# Altium PCB PCB.PcbDoc
Units mil, origin at the board's own origin, x right, y up, seen from the top; angles counter-clockwise.
Board outline 660 x 1330 mil, 8 copper layers (Top Layer, Layer 1, Layer 2, Layer 3, Layer 4, Layer 5, Layer 6, Bottom Layer), stack 29.788 mil thick; 26 components, 19 nets, 168 pads, 187 vias.
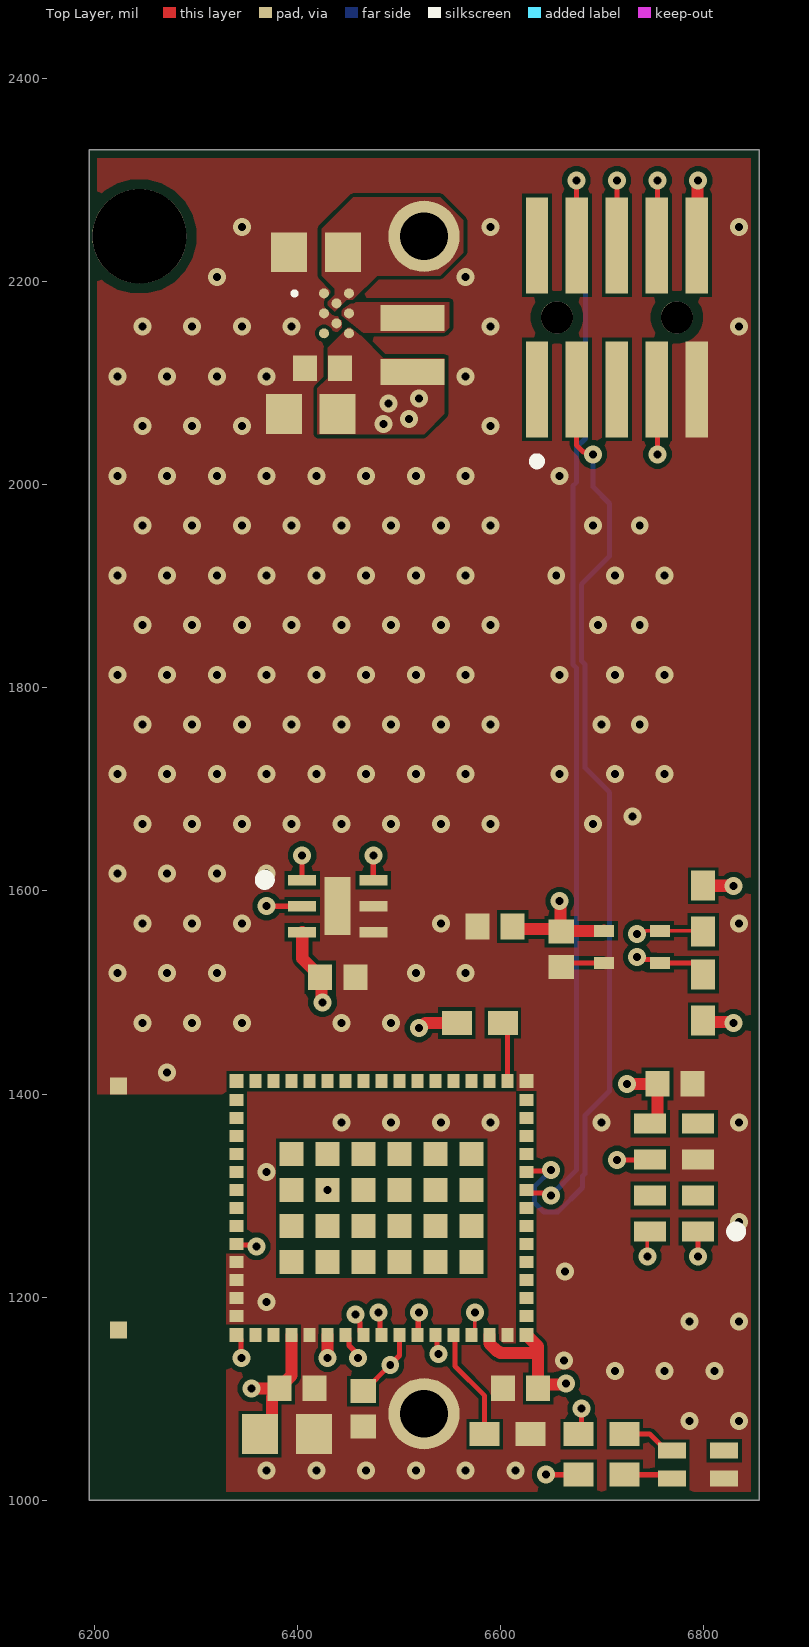
[diagram p0: Top Layer view]
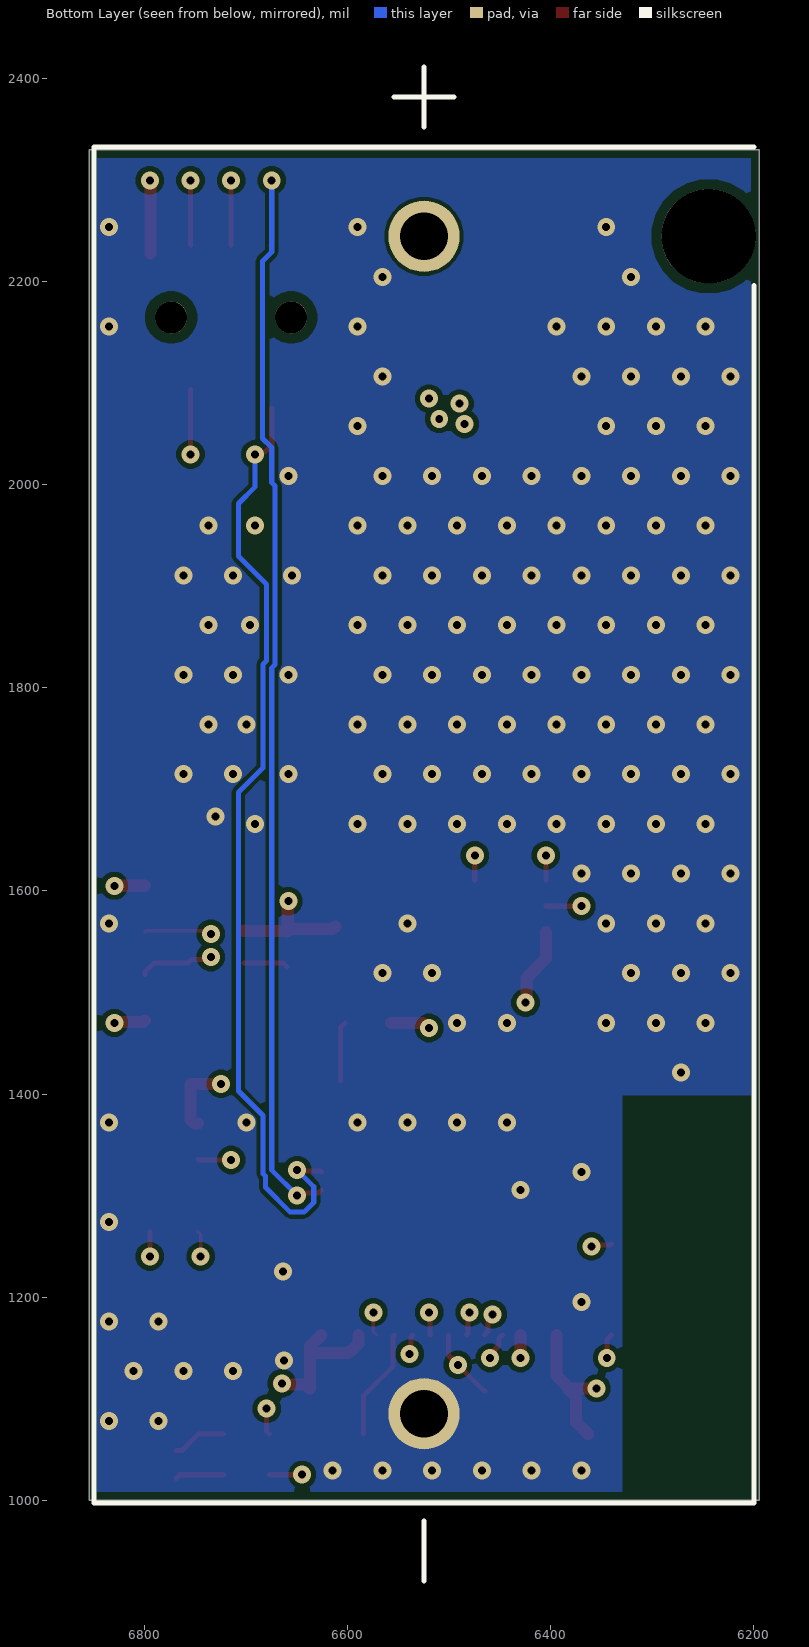
[diagram p1: Bottom Layer view, seen from below]
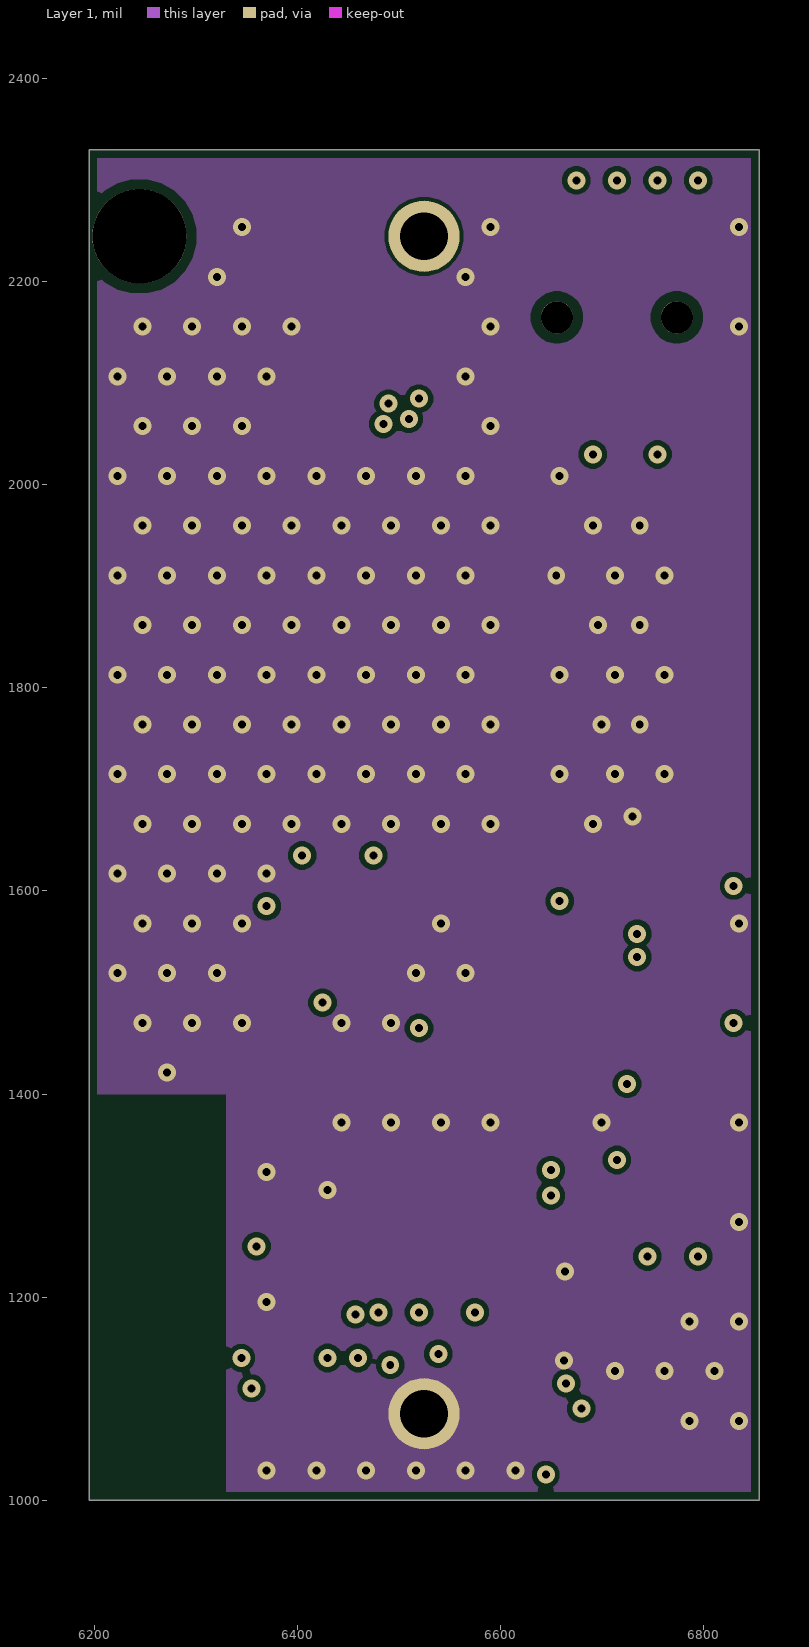
[diagram p2: Layer 1]
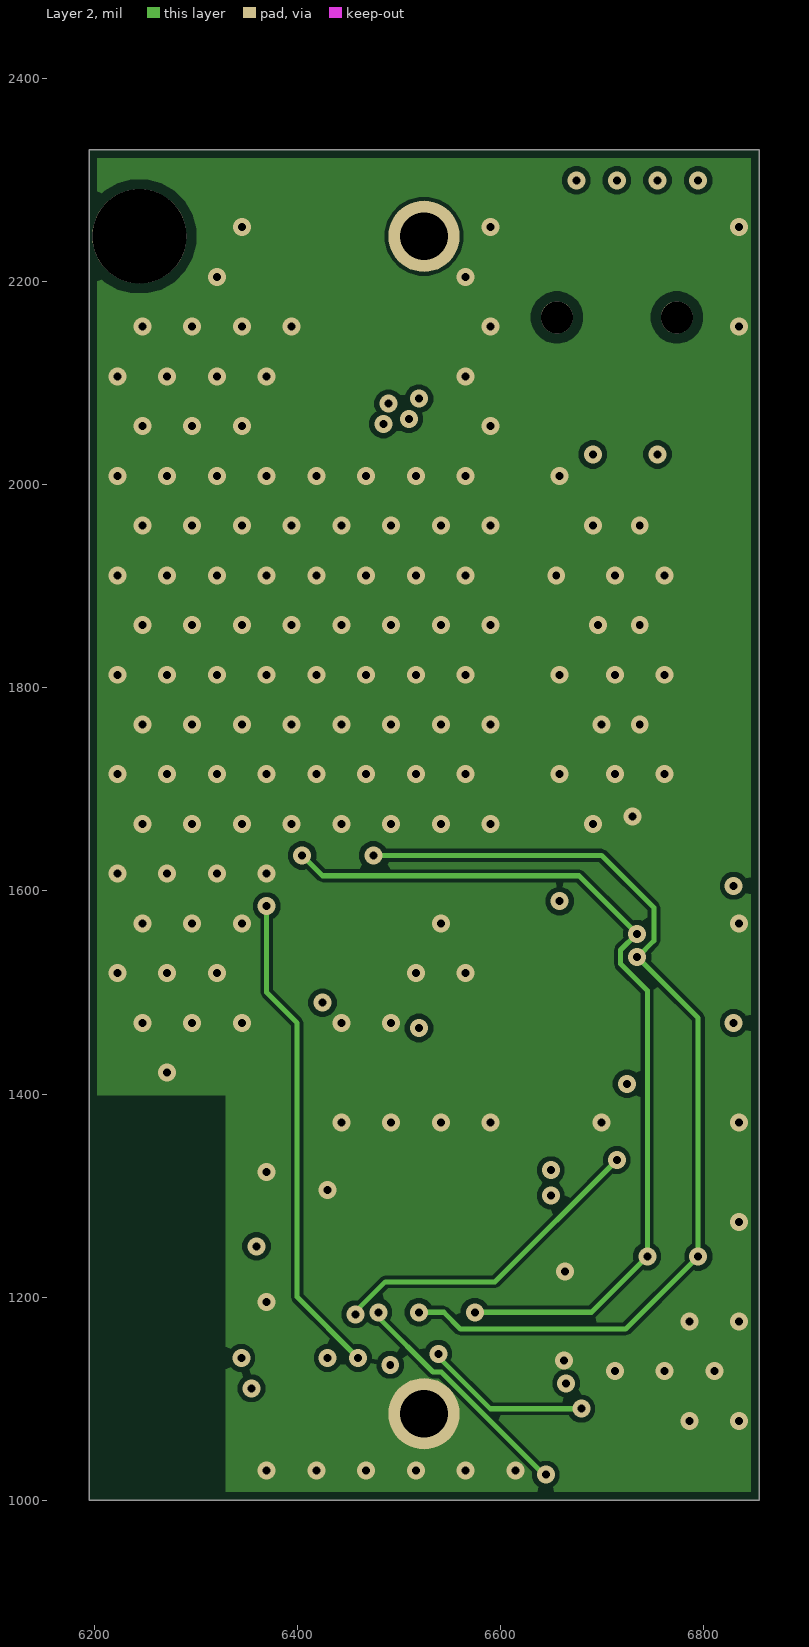
[diagram p3: Layer 2]
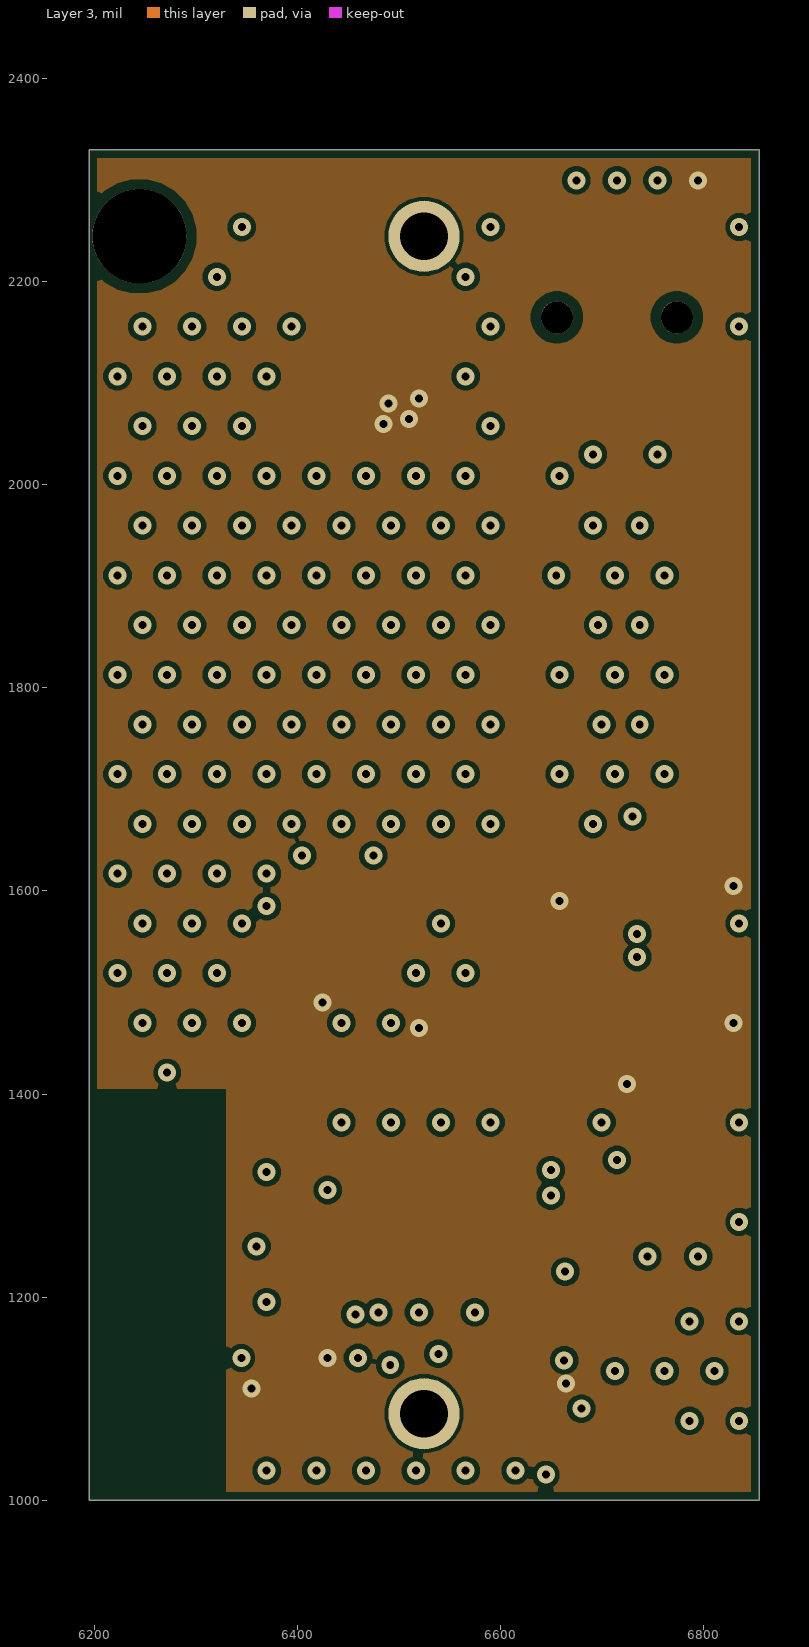
[diagram p4: Layer 3]
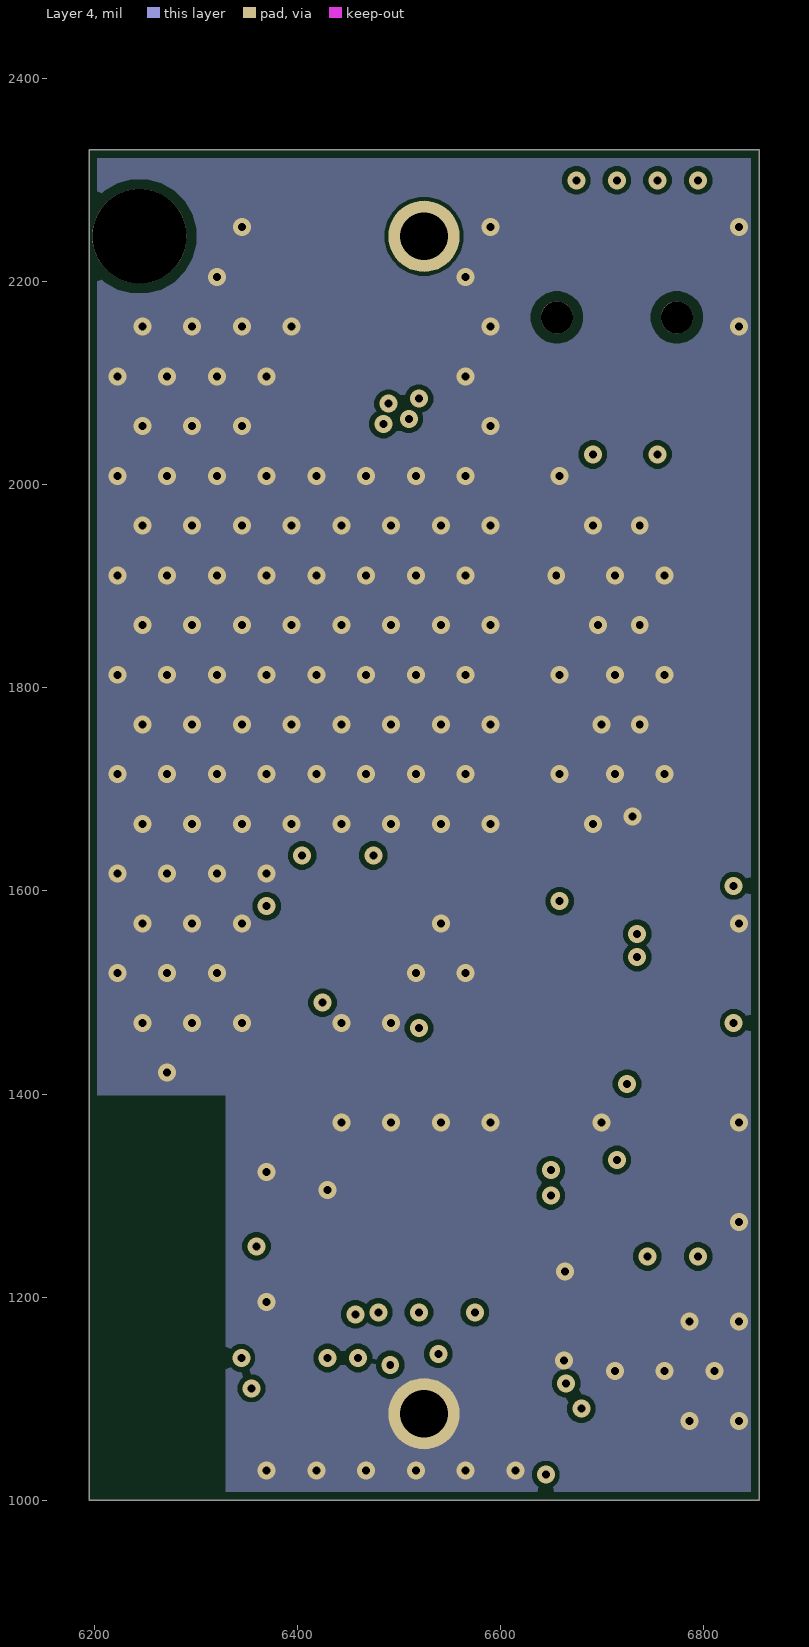
[diagram p5: Layer 4]
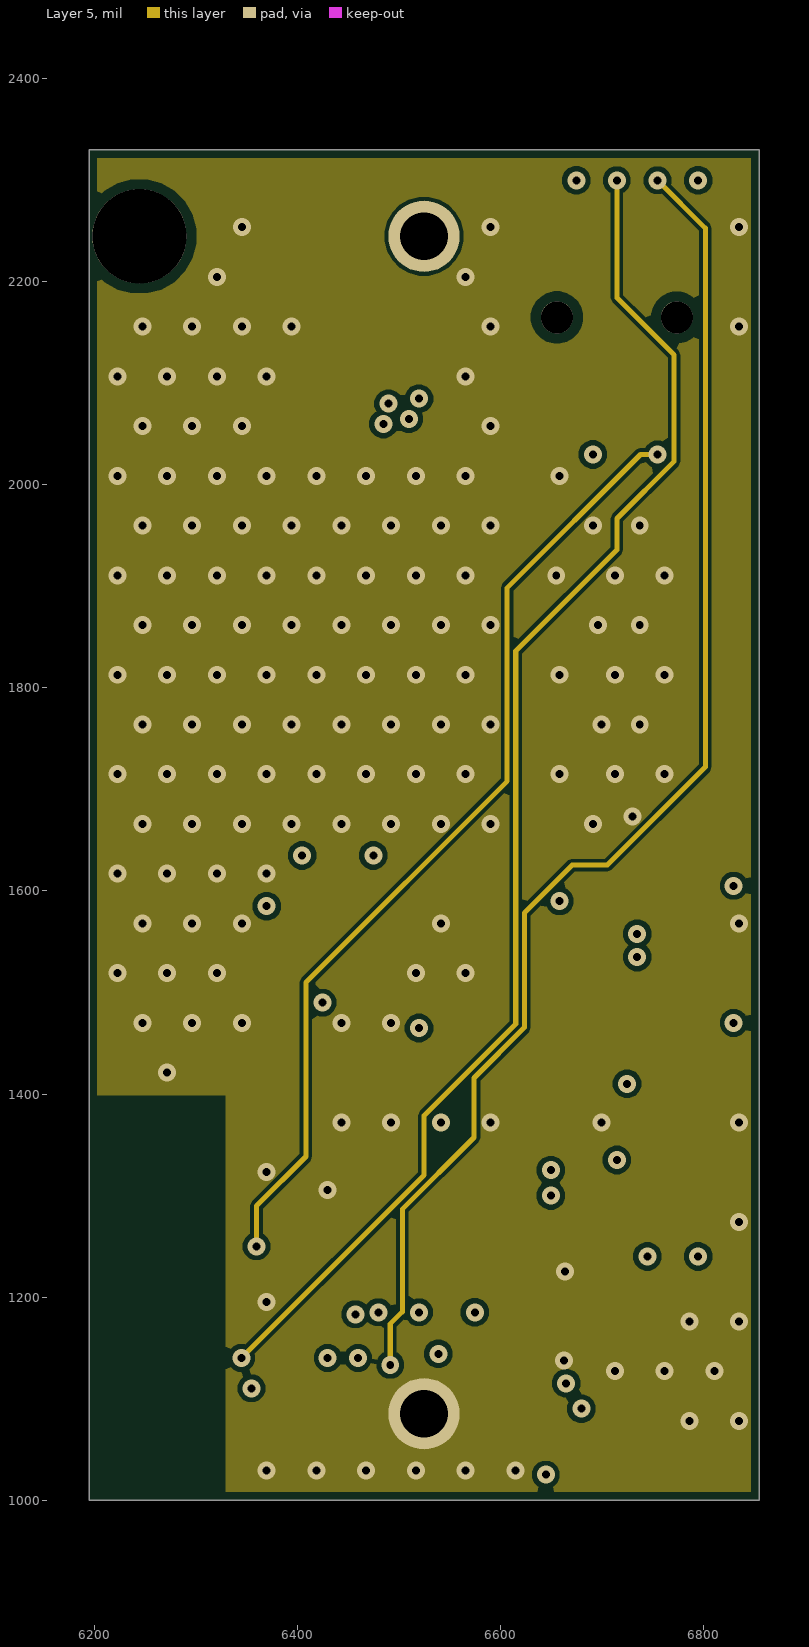
[diagram p6: Layer 5]
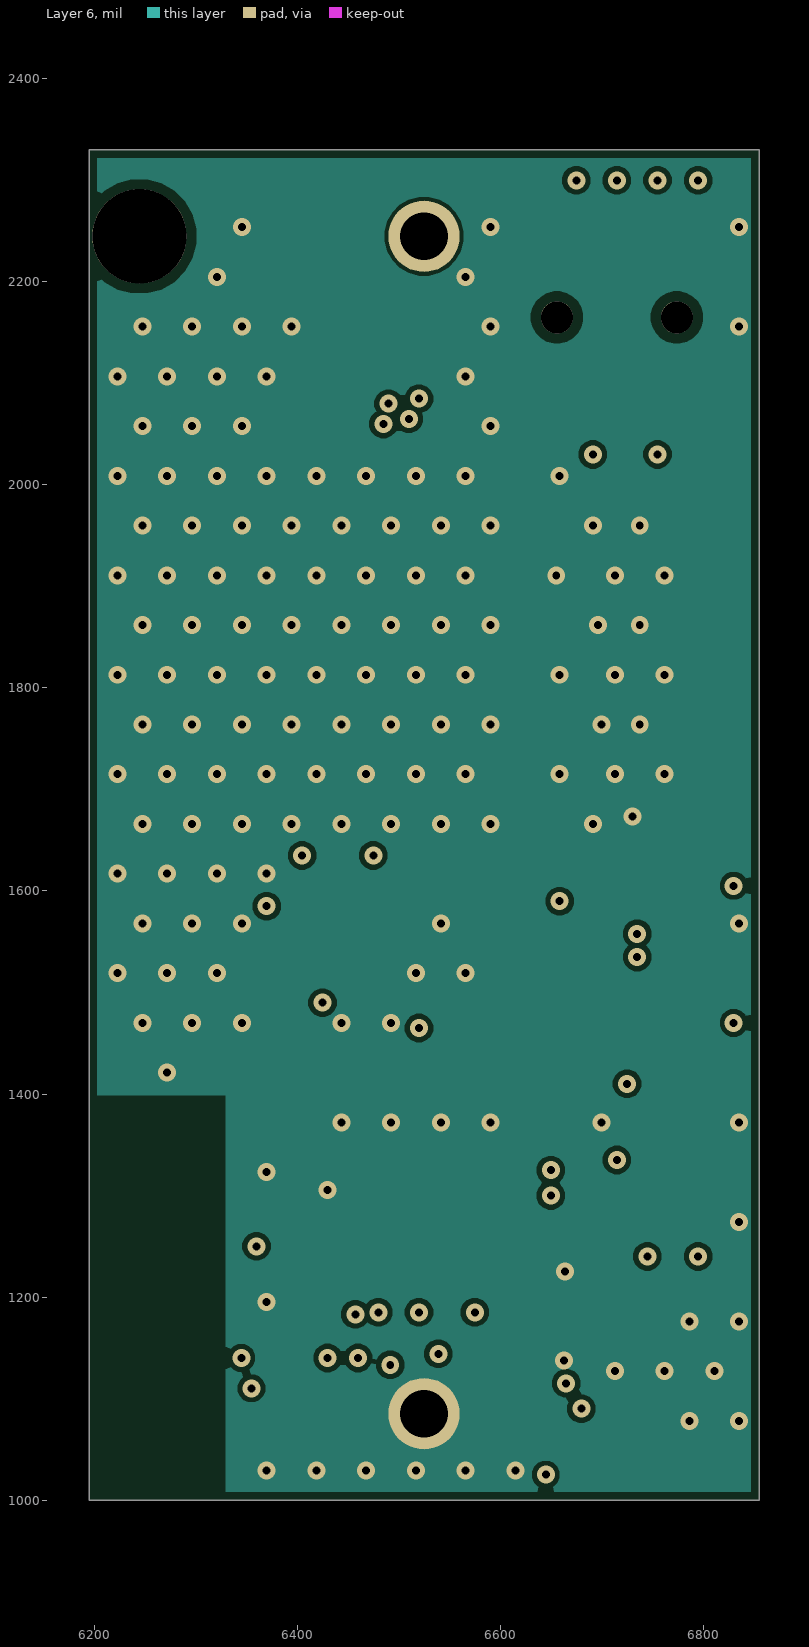
[diagram p7: Layer 6]

## Layer stack, top to bottom
Top Solder: solder mask 0.5, Solder Resist, Dk 3.8
Top Layer: signal copper 1.378
Dielectric 1: prepreg 3.0079, 1080*1, Dk 4.05
Layer 1: signal copper 0.5984
Core 1: core 2.9528, FR-4, Dk 4.5
Layer 2: signal copper 0.5984
Dielectric 2: prepreg 4.2835, 2116*1, Dk 4.25
Layer 3: signal copper 0.5984
Core 2: core 2.9528, FR-4, Dk 4.5
Layer 4: signal copper 0.5984
Dielectric 3: prepreg 4.2835, 2116*1, Dk 4.05
Layer 5: signal copper 0.5984
Dielectric 4: core 2.9528, FR-4, Dk 4.1
Layer 6: signal copper 0.5984
Dielectric 5: prepreg 3.0079, 1080*1, Dk 4.1
Bottom Layer: signal copper 1.378
Bottom Solder: solder mask 0.5, Solder Resist, Dk 3.8

## Board outline
6195,1000 6855,1000 6855,2330 6195,2330

## Design rules (kind name [scope] priority, off if disabled: settings)
BoardOutlineClearance [All] p1: gap=7.87 ignorepadtopadclearanceinfootprint=FALSE
Clearance [All] p1: gap=3.5 ignorepadtopadclearanceinfootprint=FALSE except(5: Arc-Via Track-Via SMDPad-Via THPad-Via Via-Via Via-Fill Via-Poly Via-Region Via-Text; 9.84: Arc-Hole Track-Hole SMDPad-Hole THPad-Hole Via-Hole Fill-Hole Poly-Hole Region-Hole Text-Hole)
ComponentClearance [All] p1: gap=3.5 collisioncheckmode=3 verticalgap=3.5 showdistances=TRUE
DiffPairsRouting [All] p1: maxlimit=3.5 minlimit=3.5 mostfreqgap=3.5 toplayer_minwidth=3.5 toplayer_maxwidth=71497.94 toplayer_prefwidth=3.5 midlayer1_minwidth=3.5 midlayer1_maxwidth=71497.94 midlayer1_prefwidth=3.5 midlayer2_minwidth=3.5 midlayer2_maxwidth=71497.94 midlayer2_prefwidth=3.5 midlayer3_minwidth=3.5 midlayer3_maxwidth=71497.94 midlayer3_prefwidth=3.5 midlayer4_minwidth=3.5 midlayer4_maxwidth=71497.94 midlayer4_prefwidth=3.5 midlayer5_minwidth=3.5 midlayer5_maxwidth=71497.94 midlayer5_prefwidth=3.5 midlayer6_minwidth=3.5 midlayer6_maxwidth=71497.94 midlayer6_prefwidth=3.5 bottomlayer_minwidth=3.5 bottomlayer_maxwidth=71497.94 bottomlayer_prefwidth=3.5 maxuncoupledlength=500
Height [All] p1: minheight=0 maxheight=71497.94 prefheight=500
HoleSize [All] p1: absolutevalues=TRUE maxlimit=248.03 minlimit=7.87 maxpercent=80.000 minpercent=20.000
HoleToHoleClearance [All] p1: gap=9.84 allowstackedmicrovias=FALSE
MinimumAnnularRing [All] p1: minimumring=3
MinimumSolderMaskSliver [All] p1: minsoldermaskwidth=0
PlaneClearance [All] p1: clearance=3.5
PlaneConnect PlaneConnectPowerPads [InPadClass('PowerPads')] p1: planeconnectstyle=Direct reliefexpansion=20 reliefentries=4 reliefconductorwidth=10 reliefairgap=10
PlaneConnect [All] p2: planeconnectstyle=Direct reliefexpansion=11.81 reliefentries=4 reliefconductorwidth=3.5 reliefairgap=3.5
PolygonConnect PolygonConnectPowerPads [All vs (InPadClass('PowerPads'))] p1: connectstyle=Direct reliefconductorwidth=10 reliefentries=4 polygonreliefangle="90 Angle" airgapwidth=10
PolygonConnect [All] p2: connectstyle=Direct reliefconductorwidth=3.5 reliefentries=4 polygonreliefangle="90 Angle" airgapwidth=3.5
RoomDefinition power [InComponentClass('power')] p1: confinementstyle=ConfineIn formatcopy=TRUE lockcomponents=FALSE outline 0,0 2000,0 2000,1000 0,1000
RoutingVias [All] p1: holewidth=7.87 width=17.72 viastyle="Through Hole" minholewidth=7.87 minwidth=17.72 maxholewidth=248.03 maxwidth=257.87
SilkToSilkClearance [All] p1: silktosilkclearance=0
SilkToSolderMaskClearance [IsPad] p1: minsilkscreentomaskgap=3.5 clearancetoexposedcopper=TRUE
SolderMaskExpansion SolderMaskExpansion_Via [IsVia] p1: expansion=2.95 istentingtop=TRUE
SolderMaskExpansion [All] p2: expansion=2.95 istentingtop=FALSE
Width [All] p1: maxlimit=71497.94 minlimit=3.5 preferedwidth=3.5
20 further rules are at their usual default settings.

## Classes and differential pairs
component class power: BT1 C10 C11 L1

## Components (designator, comment, footprint, x,y, rotation, side; value= is the part's Value field where it differs from the comment)
B1 "" ST1PS01AJR 6438.77,2169.04 r0 top
BT1 "" BAT_815-0931 6525,1665 r270 bottom
C1 "" "CAP 0402_1005" 6465,1090 r270 top value="0.1 µF"
C2 "" "CAP 0402_1005" 6400,1110 r180 top value="0.1 µF"
C3 "" "CAP 0402_1005" 6620,1110 r0 top value="0.1 µF"
C4 "" "CAP 0402_1005" 6440,1515 r180 top value="1 µF"
C5 "" "CAP 0402_1005" 6595,1565 r0 top value="1 µF"
C6 "" "CAP 0603_1608" 6390,1065 r180 top value="10 µF"
C7 "" "CAP 0402_1005" 6660,1542.68 r90 top value="0.1 µF"
C8 "" "CAP 0402_1005" 6772.32,1410 r180 top value="0.1 µF"
C9 "" "CAP 0402_1005" 6425,2115 r0 top value="0.1 µF"
C10 "" "CAP 0603_1608" 6418.77,2229.2 r0 top value="10 µF"
C11 "" "CAP 0603_1608" 6413.43,2070 r0 top value="10 µF"
D1 "" FP-HSMF-C165-MFG 6795,1035 r0 top
J1 "" HARWIN_M40-3200545R 6715,2165 r0 top
L1 "" "TDK VLS201612CX" 6513.77,2137.62 r270 top value="2.2 µH"
MD1 "" FP-STM32WB5MMGH6TR-MFG 6422.13,1287.72 r90 top
R1 "" "RES 0402_1005" 6580,1470 r0 top value=jmp
R2 "" "RES 0402_1005" 6607.36,1065 r180 top value="10 kOhms"
R3 "" "RES 0402_1005" 6700,1065 r180 top value="1.5 kOhms"
R4 "" "RES 0402_1005" 6800,1495 r90 top value="10 kOhms"
R5 "" "RES 0402_1005" 6800,1582.64 r270 top value="10 kOhms"
R6 "" "RES 0402_1005" 6700,1025 r180 top value="1.5 kOhms"
U1 "" STM-LCC8_V 6771.38,1317.72 r90 top
U2 "" FP-SHT40-AD1B-R2-MFG 6730,1545 r180 top
U3 "" FP-UDFN-6L-DM00423052-MFG 6440,1585 r0 top

## Footprints (in the part's own frame and the unit in brackets; to place one, negate y for a bottom-side part, rotate by r counter-clockwise, add the part's x,y. Pads: shape width x height; smd on the part's side, far side on the other; paste and mask are expansions set on the pad)
BAT_815-0931 [mm]
  round 1.785 hole 1.19: NEG(14.73,0) POS(-14.73,0)
  round 2.36 hole 2.36 unplated: ""(-14.73,7.12)
  silkscreen extent -18.97,-8.26 18.91,8.26
"CAP 0402_1005" [mm] "Chip Capacitor, 2-Leads, Body 1.02x0.51mm, IPC Medium Density"
  rect 0.6x0.64 smd: 1(-0.44,0) 2(0.44,0)
  body extent -0.5,-0.26 0.5,0.26, height 0.52
"CAP 0603_1608" [mm] "Chip Capacitor, 2-Leads, Body 1.60x0.80mm, IPC Medium Density"
  rect 0.9x1 smd: 1(-0.675,0) 2(0.675,0)
  body extent -0.8,-0.41 0.8,0.41, height 0.82
FP-HSMF-C165-MFG [mm]
  rect 0.7x0.4 smd paste+0 mask+0: 1(-0.65,0.35) 2(-0.65,-0.35) 3(0.65,0.35) 4(0.65,-0.35)
  body extent -1.1,-0.65 1.1,0.65, height 0.25
FP-SHT40-AD1B-R2-MFG [mm]
  rect 0.5x0.3 smd paste+0 mask+0: 1(-0.7,0.4) 2(-0.7,-0.4) 3(0.7,-0.4) 4(0.7,0.4)
  body extent -1.05,-0.9 1.05,0.9, height 0.25
FP-STM32WB5MMGH6TR-MFG [mm]
  rect 0.35x0.35 smd paste+0 mask+0: 1(-3.175,2.075) 17(-3.175,-5.175) 31(3.175,-5.175) 47(3.175,2.075)
  rect 0.35x0.3 smd paste+0 mask+0: 2(-3.175,1.6) 3(-3.175,1.15) 4(-3.175,0.7) 5(-3.175,0.25) 6(-3.175,-0.2) 7(-3.175,-0.65) 8(-3.175,-1.1) 9(-3.175,-1.55) 10(-3.175,-2) 11(-3.175,-2.45) 12(-3.175,-2.9) 13(-3.175,-3.35) 14(-3.175,-3.8) 15(-3.175,-4.25) 16(-3.175,-4.7) 32(3.175,-4.7) 33(3.175,-4.25) 34(3.175,-3.8) 35(3.175,-3.35) 36(3.175,-2.9) 37(3.175,-2.45) 38(3.175,-2) 39(3.175,-1.55) 40(3.175,-1.1) 41(3.175,-0.65) 42(3.175,-0.2) 43(3.175,0.25) 44(3.175,0.7) 45(3.175,1.15) 46(3.175,1.6)
  rect 0.3x0.35 smd paste+0 mask+0: 18(-2.7,-5.175) 19(-2.25,-5.175) 20(-1.8,-5.175) 21(-1.35,-5.175) 22(-0.9,-5.175) 23(-0.45,-5.175) 24(0,-5.175) 25(0.45,-5.175) 26(0.9,-5.175) 27(1.35,-5.175) 28(1.8,-5.175) 29(2.25,-5.175) 30(2.7,-5.175) 48(2.7,2.075) 49(2.25,2.075) 50(1.8,2.075) 51(1.35,2.075) 52(0.9,2.075) 53(0.45,2.075) 54(0,2.075) 55(-0.45,2.075) 56(-0.9,2.075) 57(-1.35,2.075) 58(-1.8,2.075) 59(-2.25,2.075) 60(-2.7,2.075)
  rect 0.6x0.6 smd paste+0 mask+0: 61(-1.35,0.7) 62(-1.35,-0.2) 63(-1.35,-1.1) 64(-1.35,-2) 65(-1.35,-2.9) 66(-1.35,-3.8) 67(-0.45,-3.8) 68(0.45,-3.8) 69(1.35,-3.8) 70(1.35,-2.9) 71(1.35,-2) 72(1.35,-1.1) 73(1.35,-0.2) 74(1.35,0.7) 75(0.45,0.7) 76(-0.45,0.7) 77(-0.45,-0.2) 78(-0.45,-1.1) 79(-0.45,-2) 80(-0.45,-2.9) 81(0.45,-2.9) 82(0.45,-2) 83(0.45,-1.1) 84(0.45,-0.2)
  rect 0.43x0.43 smd paste+0 mask+0: 85(-3.05,5.035) 86(3.05,5.035)
  body extent -4.19,-6.04 4.19,6.04, height 0.25
FP-UDFN-6L-DM00423052-MFG [mm]
  rect 0.7x0.27 smd paste+0 mask-1000: 1(-0.89,0.65) 2(-0.89,0) 3(-0.89,-0.65) 4(0.89,-0.65) 5(0.89,0) 6(0.89,0.65)
  rect 0.65x1.45 smd paste+0 mask-1000: 7(0,0)
  silkscreen extent -1.95,0.54 -1.7,0.78, body extent -1.34,-1.12 1.34,1.12, height 0.25
HARWIN_M40-3200545R [mm]
  rect 0.56x2.4 smd: 1(-2,-1.8) 2(-2,1.8) 3(-1,-1.8) 4(-1,1.8) 5(0,-1.8) 6(0,1.8) 7(1,-1.8) 8(1,1.8) 9(2,-1.8) 10(2,1.8)
  round 0.8 hole 0.8 unplated: ""(-1.5,0) ""(1.5,0)
  silkscreen extent -2.1,-3.7 -1.9,-3.5
"RES 0402_1005" [mm] "Chip Resistor, 2-Leads, Body 1.0x0.5mm, IPC Medium Density"
  rect 0.75x0.6 smd: 1(-0.575,0) 2(0.575,0)
  body extent -0.5,-0.25 0.5,0.25, height 0.35
ST1PS01AJR [mm]
  round 0.25 smd: A1(-0.312,0.5) A3(0.312,0.5) B2(0,0.25) C1(-0.312,0) C3(0.312,0) D2(0,-0.25) E1(-0.312,-0.5) E3(0.312,-0.5)
  silkscreen extent -1.1,0.45 -1,0.55
STM-LCC8_V [mm] "LCC, 8-Leads, Body 3.2x1.5mm, Pitch 0.9mm"
  rect 0.5x0.8 smd: 1(-1.35,-0.6) 2(-0.45,-0.6) 3(0.45,-0.6) 4(1.35,-0.6) 5(1.35,0.6) 6(0.45,0.6) 7(-0.45,0.6) 8(-1.35,0.6)
  silkscreen extent -1.47,-1.68 -1.23,-1.43, body extent -1.6,-0.75 1.6,0.75, height 0.8
"TDK VLS201612CX" [mm] "Inductor, 2-Leads, Body 2.00x1.60mm, IPC Medium Density"
  rect 0.65x1.6 smd: 1(-0.675,0) 2(0.675,0)
  body extent -1,-0.8 1,0.8, height 1.2

## Part data
B1: library part ST1PS01AJR, "Switching Voltage Regulators 400 mA nano-quiescent synchronous step-down converter digital volt selection & P", Manufacturer_Name=STMicroelectronics, Mouser Part Number=511-ST1PS01AJR, Arrow Part Number=ST1PS01AJR, Arrow Price/Stock=https://www.arrow.com/en/products/st1ps01ajr/stmicroelectronics?region=nac, Datasheet Link=https://www.st.com/resource/en/datasheet/st1ps01.pdf, Geometry.Height=0.6mm, Manufacturer_Part_Number=ST1PS01AJR, Mouser Price/Stock=https://www.mouser.co.uk/ProductDetail/STMicroelectronics/ST1PS01AJR?qs=P19jvy6W2mdx%252Bu2ylwJ4Uw%3D%3D
BT1: library part 815-0931, "Holder 1/2aa Battery w/o Cover", Package=None, Availability=Unavailable, MP=815-0931, price=None
C1 C2 C8 C9: library part C0402C104K7PAC7867, "CAP CER 0.1UF 4V X5R 0402", Capacitance="0.1 µF", Device Package="0402 (1005 Metric)", Manufacturer=KEMET, Operating Temperature="-55°C ~ 85°C", Supplier Part Number 1=399-14871-1-ND, Temperature Coefficient=X5R, Tolerance=±10%, Voltage - Rated=4V, Applications="Bypass, Decoupling", componentlink1description=Datasheet, componentlink1url=https://api.kemet.com/component-edge/download/datasheet/C0402C104K7PAC7867.pdf, ComponentLink2Description="DigiKey Link", ComponentLink2URL=https://www.digikey.com/en/products/detail/kemet/C0402C104K7PAC7867/7381987, lastupdated="1/9/2022 12:30:40 pm", Lifecycle Status=Active, Minimum Order=1, Mounting Type="Surface Mount, MLCC", Package / Case="0402 (1005 Metric)", packaging=TapeAndReel, Part Number=C0402C104K7PAC7867, Part Status=Active, partid=5603, price=0.01, series="SMD Comm X5R", Size / Dimension="0.039\" L x 0.020\" W (1.00mm x 0.50mm)", Supplier 1=DigiKey, Thickness (Max)="0.022\" (0.55mm)"
C3 C7: library part C0402C104K4RECAUTO, "CAP CER 0402 0.1UF 16V X7R 10%", Capacitance="0.1 µF", Device Package="0402 (1005 Metric)", Manufacturer=KEMET, Operating Temperature="-55°C ~ 125°C", Ratings=AEC-Q200, Supplier Part Number 1=399-17167-1-ND, Temperature Coefficient=X7R, Tolerance=±10%, Voltage - Rated=16V, Applications="Automotive, ESD Protection", componentlink1description=Datasheet, componentlink1url=https://api.kemet.com/component-edge/download/datasheet/C0402C104K4RECAUTO.pdf, ComponentLink2Description="DigiKey Link", ComponentLink2URL=https://www.digikey.com/en/products/detail/kemet/C0402C104K4RECAUTO/8563695, lastupdated="1/9/2022 12:30:53 pm", Lifecycle Status=Active, Minimum Order=1, Mounting Type="Surface Mount, MLCC", Package / Case="0402 (1005 Metric)", packaging=TapeAndReel, Part Number=C0402C104K4RECAUTO, Part Status=Active, partid=1731, price=0.01, series="ESD SMD Auto X7R", Size / Dimension="0.039\" L x 0.020\" W (1.00mm x 0.50mm)", Supplier 1=DigiKey, Thickness (Max)="0.022\" (0.55mm)"
C4 C5: library part LMK105BJ105MVHF, "CAP CER 1UF 10V X5R 0402", Capacitance="1 µF", Device Package="0402 (1005 Metric)", Manufacturer="Taiyo Yuden", Operating Temperature="-55°C ~ 85°C", Ratings=AEC-Q200, Supplier Part Number 1=587-6276-1-ND, Temperature Coefficient=X5R, Tolerance=±20%, Voltage - Rated=10V, Applications="Automotive, SMPS Filtering", componentlink1description=Datasheet, componentlink1url="https://ds.yuden.co.jp/TYCOMPAS/ut/detail?pn=LMK105BJ105MVHF &u=M", ComponentLink2Description="DigiKey Link", ComponentLink2URL=https://www.digikey.com/en/products/detail/taiyo-yuden/LMK105BJ105MVHF/7403746, lastupdated="1/9/2022 12:30:35 pm", Lifecycle Status=Active, Minimum Order=1, Mounting Type="Surface Mount, MLCC", Package / Case="0402 (1005 Metric)", packaging=TapeAndReel, Part Number=LMK105BJ105MVHF, Part Status=Active, partid=46675, price=0.01, series=M, Size / Dimension="0.039\" L x 0.020\" W (1.00mm x 0.50mm)", Supplier 1=DigiKey, Thickness (Max)="0.022\" (0.55mm)"
C6 C10 C11: library part GRM188R60J106ME47D, "CAP CER 10UF 6.3V X5R 0603", Capacitance="10 µF", Device Package="0603 (1608 Metric)", Manufacturer="Murata Electronics", Operating Temperature="-55°C ~ 85°C", Supplier Part Number 1=490-3896-1-ND, Temperature Coefficient=X5R, Tolerance=±20%, Voltage - Rated=6.3V, Applications="General Purpose", componentlink1description=Datasheet, componentlink1url=https://www.murata.com/~/media/webrenewal/support/library/catalog/products/capacitor/mlcc/c02e.ashx?la=en-us, ComponentLink2Description="DigiKey Link", ComponentLink2URL=https://www.digikey.com/en/products/detail/murata-electronics/GRM188R60J106ME47D/965910, lastupdated="11/9/2022 9:40:24 am", Lifecycle Status=Active, Minimum Order=1, Mounting Type="Surface Mount, MLCC", Package / Case="0603 (1608 Metric)", packaging=TapeAndReel, Part Number=GRM188R60J106ME47D, Part Status=Active, partid=2351, price=0.02, series=GRM, Size / Dimension="0.063\" L x 0.031\" W (1.60mm x 0.80mm)", Supplier 1=DigiKey, Thickness (Max)="0.035\" (0.90mm)"
D1: library part CMP-2000-06424-2, "LED GREEN/RED DIFFUSED 0603 SMD", Case Code (Imperial)=0603, Case Code (Metric)=1608, Color=Green, Forward Current=20mA, Forward Voltage=2.2V, Lens Color=White, Max Operating Temperature=85°C, Min Operating Temperature=-40°C, Package Quantity=1, Power Dissipation=52mW, Reverse Voltage=5V, Case/Package=0603, Depth=0.8mm, Dominant Wavelength=621nm, Height=0.5mm, Illumination Color=Green, Lead Free="Lead Free", Length=1.6mm, Lens Style=Rectangular, Lens Transparency=Diffused, Luminous Intensity=10mcd, Mount="Surface Mount", Number of Elements=2, Number of LEDs=2, Number of Pins=4, Number of Terminals=4, packaging="Tape and Reel", Power Rating=52mW, Radiation Hardening=No, REACH SVHC="No SVHC", Shape=Rectangular, Test Current=20mA, Viewing Angle=120°, Wavelength=572nm, Width=0.8mm
J1: library part M40-3200545R, "Connector Header Surface Mount 10 position 0.039 _1.00mm_", Package=None, Availability=Unavailable, MF="Harwin Inc.", MP=M40-3200545R, price=None, SnapEDA_Link=https://www.snapeda.com/parts/M40-3200545R/Harwin%20Inc./view-part/494409/?ref=snap
L1: library part VLS201612CX-6R8M-1, "FIXED IND 6.8UH 930MA 368MOHM SM", Current - Saturation=730mA, Current Rating (Amps)="930 mA", DC Resistance (DCR)="368mOhm Max", Device Package=Nonstandard, Inductance="6.8 µH", Inductance Frequency - Test="1 MHz", Manufacturer="TDK Corporation", Operating Temperature="-40°C ~ 105°C", Supplier Device Package=2016, Supplier Part Number 1=445-172966-1-ND, Tolerance=±20%, componentlink1description=Datasheet, componentlink1url=https://product.tdk.com/info/en/catalog/datasheets/inductor_commercial_power_vls201612cx-1_en.pdf?ref_disty=digikey, ComponentLink2Description="DigiKey Link", ComponentLink2URL=https://www.digikey.com/en/products/detail/tdk-corporation/VLS201612CX-6R8M-1/5169771, Height - Seated (Max)="0.047\" (1.20mm)", lastupdated="11/9/2022 10:31:03 am", Lifecycle Status=Active, Material - Core=Ferrite, Minimum Order=1, Mounting Type="Surface Mount", Package / Case=Nonstandard, packaging=TapeAndReel, Part Number=VLS201612CX-6R8M-1, Part Status=Active, partid=207, price=0.13, series=VLS-CX-1, Shielding=Shielded, Size / Dimension="0.079\" L x 0.063\" W (2.00mm x 1.60mm)", Supplier 1=DigiKey, Type="Drum Core, Wirewound"
MD1: library part CMP-12160-000017-1, "ULTRA-LOW-POWER DUAL CORE ARM CO"
R1 R2 R4 R5: library part RP73PF1E10KBTD, "RES 10K OHM 0.1% 1/10W 0402", Device Package="0402 (1005 Metric)", Manufacturer="TE Connectivity Passive Product", Operating Temperature="-55°C ~ 155°C", Power (Watts)="0.1W, 1/10W", Resistance="10 kOhms", Supplier Device Package=0402, Supplier Part Number 1=A127415CT-ND, Temperature Coefficient=±25ppm/°C, Tolerance=±0.1%, componentlink1description=Datasheet, componentlink1url=https://www.te.com/commerce/DocumentDelivery/DDEController?Action=srchrtrv&DocNm=1773272&DocType=DS&DocLang=English, ComponentLink2Description="DigiKey Link", ComponentLink2URL=https://www.digikey.com/en/products/detail/te-connectivity-passive-product/RP73PF1E10KBTD/8260957, Composition="Thin Film", Height - Seated (Max)="0.014\" (0.35mm)", lastupdated="1/9/2022 12:46:57 pm", Lifecycle Status=Active, Minimum Order=1, Number of Terminations=2, Package / Case="0402 (1005 Metric)", packaging=TapeAndReel, Part Number=RP73PF1E10KBTD, Part Status=Active, partid=2434, price=0.09, series="RP73, Holsworthy", Size / Dimension="0.039\" L x 0.020\" W (1.00mm x 0.50mm)", Supplier 1=DigiKey
R3 R6: library part ERA-2VRW1501X, "RES 1.5K OHM 0.05% 1/10W 0402", Device Package="0402 (1005 Metric)", Manufacturer="Panasonic Electronic Components", Operating Temperature="-55°C ~ 155°C", Power (Watts)="0.1W, 1/10W", Ratings=AEC-Q200, Resistance="1.5 kOhms", Supplier Device Package=0402, Supplier Part Number 1=10-ERA-2VRW1501XCT-ND, Temperature Coefficient=±10ppm/°C, Tolerance=±0.05%, componentlink1description=Datasheet, componentlink1url=https://api.pim.na.industrial.panasonic.com/file_stream/main/fileversion/9152, ComponentLink2Description="DigiKey Link", ComponentLink2URL=https://www.digikey.com/en/products/detail/panasonic-electronic-components/ERA-2VRW1501X/12086957, Composition="Thin Film", Features="Anti-Sulfur, Automotive AEC-Q200", Height - Seated (Max)="0.016\" (0.40mm)", lastupdated="11/9/2022 9:53:08 am", Lifecycle Status=Active, Minimum Order=1, Number of Terminations=2, Package / Case="0402 (1005 Metric)", packaging=TapeAndReel, Part Number=ERA-2VRW1501X, Part Status=Active, partid=67400, price=0.24, series=ERA-2V, Size / Dimension="0.039\" L x 0.020\" W (1.00mm x 0.50mm)", Supplier 1=DigiKey
U1: library part CMP-2000-06643-1, "Low-Power Serial Real-Time Clock (RTC) with Alarm, 400 KHz, 1.3 to 4.4 V, -40 to 85 degC, 8-Pin LCC, RoHS, Tape and Reel", Current - Timekeeping (Max)=0.7µA~0.95µA@1.3V~4.4V, Manufacturer=STMicroelectronics, Operating Temperature=-40°C~85°C, Package / Case=8-LCC, Package Description="8-Pin Leadless Ceramic Chip Carrier, Body 3.2 x 1.5 mm, Pitch 0.9 mm", Package Reference=LCC8, Standard Package=1, Supplier Device Package=8-LCC(1.5x3.2), Voltage - Supply=1.3V~4.4V, Category=IntegratedCircuits(ICs), Datasheet URL=http://www.st.com/web/en/resource/technical/document/datasheet/CD00019860.pdf, Datasheet Version="Rev. 22, 10/2015", Date Format=YY-MM-DD-dd, Family=Clock/Timing-RealTimeClocks, Features=Alarm,LeapYear,SquareWaveOutput,WatchdogTimer, For Use With="497-16464-ND / -EVALBOARDFORM41T62", Interface=I²C,2-WireSerial, Manufacturer URL=http://www.st.com/, Mounting Technology=SurfaceMount, Mounting Type=SurfaceMount, Online Catalog=SerialAddress, Other Names=497-11275-1, Other Related Documents=M41T62ViewAllSpecifications, packaging=CutTape(CT), Product Training Modules=SmartGridSolutions:SmartGridDistribution/SmartMeters, series=Timekeeper®, Time Format=HH:MM:SS:hh(24hr), Type=Clock/Calendar
U2: library part CMP-144040-000008-1, "SENSOR HUMIDITY 100 RH SMD"
U3: library part CMP-12184-000002-1, "LOW-VOLTAGE, ULTRA-LOW-POWER, 0.", Manufacturer=STMicroelectronics, Manufacturer Part Number=STTS22HTR, Max Supply Voltage=3.6V, Min Supply Voltage=1.5V, Operating Supply Current=1.75-120uA, Package=UDFN-6L-DM00423052, Temperature="-40°C to +125°C", Temperature Range High=+125°C, Temperature Range Low=-40°C, Automotive=No, Category=IC, ComponentLink2Description=Datasheet, ComponentLink2URL=https://www.st.com/resource/en/datasheet/stts22h.pdf, Device Class L1=Sensors, Device Class L2="Temperature and Humidity Sensors", Device Class L3=unset, Digikey Description="LOW-VOLTAGE, ULTRA-LOW-POWER, 0.", Height=0.55mm, Interface=I2C,SMBus, Lead Free=Yes, Mouser Description="Low-voltage, ultra-low-power, 0.5 ï¿½C accuracy Iï¿½C/SMBus 3.0 temperature sensor", Octopart=https://octopart.com/stts22htr-stmicroelectronics-103417944, Resolution=16bits, RoHS=TRUE, Sensor Output=I2C,SMBus, Standoff Height=0mm

## Via types
v1: diameter 17.72, hole 7.87, Top Layer to Bottom Layer, tented both sides, 187 vias

## Nets (pads, with @x,y where several pads share a name; then routed paths per layer and width w, separated by ;. In a path a pad name is that pad's centre, name@x,y a point inside that pad or via, vN(x,y) a via of type N, cw(c..) or ccw(c..) an arc to the next point about the centre after c; other vN are vias at no path point)
1V8: B1.E3 C2.2 C3.2 C4.2 C5.2 C6.2 C7.2 C8.2 C9.2 C11.2 J1.10 L1.2 MD1.4 MD1.6 MD1.15 MD1.17 R1.1 R4.1 R5.1 U1.5 U2.3 U3.3 | length 758.7
  Top Layer w12: v1(6355,1110) C2.2 ; C6.2 6375.14,1076.72 6375.14,1101.68 6382.68,1109.21 C2.2 ; MD1.4 6394.57,1122.68 6382.68,1110.79 C2.2 ; U3.3 U3.3 6405,1533.46 6422.68,1515.79 C4.2 6423.91,1513.77 6423.91,1491.09 v1(6425,1490) ; v1(6430,1140) MD1.6 ; v1(6520,1465) 6521.55,1465 6526.55,1470 R1.1 ; MD1.15 6589.54,1162.62 6589.54,1154.11 6597.32,1146.33 6598.67,1146.33 6600,1145 6631.06,1145 6637.32,1151.26 ; C5.2 6614.82,1562.5 6657.5,1562.5 C7.2 ; MD1.17 6637.32,1151.26 ; v1(6658.64,1590) 6659.32,1589.32 6659.32,1560.68 C7.2 ; v1(6665,1115) 6663.91,1113.91 6641.23,1113.91 C3.2 6637.32,1151.26 ; U2.3 6702.35,1560.65 6660.65,1560.65 C7.2 ; v1(6725,1410) C8.2 6755,1374.71 6751.16,1370.87 U1.5 ; J1.10@6794.37,2228.03 6794.37,2299.37 v1(6795,2300) ; R4.1 6801.27,1471.09 6828.91,1471.09 v1(6830,1470) ; R5.1 6800.14,1605.14 6829.86,1605.14 v1(6830,1605)
  other v1: 6485,2060 6510,2065 6490,2080 6520,2085
GND: B1.A1 B1.C1 B1.D2 BT1.NEG C1.2 C2.1 C3.1 C4.1 C5.1 C6.1 C7.1 C8.1 C9.1 C10.1 C11.1 D1.4 J1.9 MD1.5 MD1.16 MD1.31 MD1.57 MD1.58 MD1.59 MD1.60 MD1.84 MD1.86 R2.1 U1.3 U2.4 U3.4 U3.5 U3.7 | length 44.1
  Top Layer w5: C7.1 6663.9,1529.25 U2.4
  other v1: 6370,1029 6419,1029 6468,1029 6517,1029 6566,1029 6615,1029 6786.5,1078 6835.5,1078 6713,1127 6762,1127 6811,1127 6663.11,1137.64 6786.5,1176 6835.5,1176 6370,1195 6664,1225 6835.5,1274 6430,1305.43 6370,1323 6443.5,1372 6492.5,1372 6541.5,1372 6590.5,1372 6699.86,1372 6835.5,1372 6272,1421 6247.5,1470 6296.5,1470 6345.5,1470 6443.5,1470 6492.5,1470 6223,1519 6272,1519 6321,1519 6517,1519 6566,1519 6247.5,1568 6296.5,1568 6345.5,1568 6541.5,1568 6835.5,1568 6223,1617 6272,1617 6321,1617 6370,1617 6247.5,1666 6296.5,1666 6345.5,1666 6394.5,1666 6443.5,1666 6492.5,1666 6541.5,1666 6590.5,1666 6691.36,1666 6730.18,1673.32 6223,1715 6272,1715 6321,1715 6370,1715 6419,1715 6468,1715 6517,1715 6566,1715 6658.64,1715 6713,1715 6762,1715 6247.5,1764 6296.5,1764 6345.5,1764 6394.5,1764 6443.5,1764 6492.5,1764 6541.5,1764 6590.5,1764 6699.86,1764 6737.5,1764 6223,1813 6272,1813 6321,1813 6370,1813 6419,1813 6468,1813 6517,1813 6566,1813 6658.64,1813 6713,1813 6762,1813 6247.5,1862 6296.5,1862 6345.5,1862 6394.5,1862 6443.5,1862 6492.5,1862 6541.5,1862 6590.5,1862 6696.47,1862 6737.5,1862 6223,1911 6272,1911 6321,1911 6370,1911 6419,1911 6468,1911 6517,1911 6566,1911 6655.25,1911 6713,1911 6762,1911 6247.5,1960 6296.5,1960 6345.5,1960 6394.5,1960 6443.5,1960 6492.5,1960 6541.5,1960 6590.5,1960 6691.36,1960 6737.5,1960 6223,2009 6272,2009 6321,2009 6370,2009 6419,2009 6468,2009 6517,2009 6566,2009 6658.64,2009 6247.5,2058 6296.5,2058 6345.5,2058 6590.5,2058 6223,2107 6272,2107 6321,2107 6370,2107 6566,2107 6247.5,2156 6296.5,2156 6345.5,2156 6394.5,2156 6590.5,2156 6835.5,2156 6321,2205 6566,2205 6345.5,2254 6590.5,2254 6835.5,2254
INT_RTC: MD1.8 U1.6 | length 378.6
  Top Layer w5: v1(6457.38,1182.95) 6457.38,1179.51 6462.03,1174.85 6462.03,1166.12 MD1.8 ; v1(6715,1335) 6747.32,1335 U1.6
  Layer 2 w5: v1(6457.38,1182.95) 6457.38,1185.51 6486.87,1215 6595,1215 v1(6715,1335)
INT_TS: MD1.7 U3.2 | length 545
  Top Layer w5: v1(6370,1585) U3.2 ; MD1.7 6451.12,1159.31 6451.12,1152.32 6460,1143.44 v1(6460,1140)
  Layer 2 w5: v1(6370,1585) 6370,1500 6400,1470 6400,1200 v1(6460,1140)
LED1: MD1.12 R3.2 | length 210.9
  Top Layer w5: MD1.12 6537.68,1161.33 6537.68,1145.45 v1(6539.07,1144.07) ; R3.2 6680,1067.64 v1(6680,1090)
  Layer 2 w5: v1(6539.07,1144.07) 6539.07,1141.21 6590.28,1090 v1(6680,1090)
LED2: MD1.9 R6.2 | length 290.2
  Top Layer w5: v1(6480,1185) 6481.57,1183.43 6481.57,1164.29 MD1.9 ; v1(6645,1025) R6.2
  Layer 2 w5: v1(6480,1185) 6482.43,1182.57 6482.43,1177.57 6533.78,1126.22 6542.04,1126.22 6643.26,1025 v1(6645,1025)
NetB1_A3: B1.A3 B1.B2 BT1.POS C10.2
NetB1_C3: B1.C3 L1.1
NetD1_1: D1.1 R3.1 | length 53.5
  Top Layer w5: R3.1 6747.28,1065 6763.5,1048.78 D1.1
NetD1_2: D1.2 R6.1 | length 48.3
  Top Layer w5: R6.1 6765.63,1025 D1.2
NetMD1_13: MD1.13 R2.2 | length 110.4
  Top Layer w5: MD1.13 6555.43,1161.31 6555.43,1131.97 6584.72,1102.67 R2.2
NetMD1_32: MD1.32 R1.2 | length 59.2
  Top Layer w5: R1.2 6607.17,1465.47 MD1.32
nRST: C1.1 J1.8 MD1.10 | length 1470.1
  Top Layer w5: C1.1 6465.79,1107.32 v1(6491.73,1133.27) 6500.87,1142.4 MD1.10 ; J1.8 6755,2236.5 v1(6755,2300)
  Layer 5 w5: v1(6491.73,1133.27) 6491.73,1173.6 6503.64,1185.51 6503.64,1286.62 6574.14,1357.12 6574.14,1415.76 6623.86,1465.47 6623.86,1578.35 6671.01,1625.5 6705.5,1625.5 6802.15,1722.15 6802.15,2252.85 v1(6755,2300)
RX: J1.7 MD1.56 | length 1038.3
  Top Layer w5: MD1.56 6341.57,1251.14 6358.86,1251.14 v1(6360,1250) ; J1.7 6755,2093.5 v1(6755,2030)
  Layer 5 w5: v1(6360,1250) 6360,1289.87 6408.64,1338.51 6408.64,1510.01 6606.86,1708.22 6606.86,1898.63 6738.22,2030 v1(6755,2030)
SCL: MD1.14 R5.2 U1.8 U2.2 U3.1 | length 1030.8
  Top Layer w3.5: MD1.14 6575,1165.98 v1(6575,1185) ; v1(6735,1557.72) 6737.72,1560.44 6743.31,1560.44 6743.62,1560.75 U2.2 6799.25,1560.75 R5.2 ; v1(6745,1240) 6745,1261.81 U1.8
  Top Layer w5: U3.1 U3.1 v1(6405,1635)
  Layer 2 w5: v1(6405,1635) 6425,1615 6677.72,1615 v1(6735,1557.72) 6734.58,1557.72 6718.64,1541.78 6718.64,1528.22 6745,1501.87 v1(6745,1240) 6690,1185 v1(6575,1185)
SDA: MD1.11 R4.2 U1.1 U2.1 U3.6 | length 1129.9
  Top Layer w5: v1(6475,1635) U3.6 U3.6 ; MD1.11 6519.29,1163.43 6519.29,1184.29 v1(6520,1185) ; v1(6735,1535) 6737.43,1532.57 6754.24,1532.57 U2.1 6790.69,1529.25 6800,1519.94 R4.2 ; v1(6795,1240) U1.1
  Layer 2 w5: v1(6475,1635) 6700,1635 6751.36,1583.64 6751.36,1550.94 6735.42,1535 v1(6735,1535) 6795,1475 v1(6795,1240) 6723.64,1168.64 6560.79,1168.64 6544.43,1185 v1(6520,1185)
SWDCLK: J1.3 MD1.26 | length 944.4
  Top Layer w5: MD1.26 6626.79,1324.07 6649.07,1324.07 v1(6650,1325) ; J1.3@6675,2075.88 6675,2039.39 6681.96,2032.43 6688.93,2032.43 v1(6691.36,2030)
  Bottom Layer w5: v1(6650,1325) 6633.64,1308.64 6633.64,1293.22 6643.22,1283.64 6656.78,1283.64 6681.01,1307.88 6681.01,1318.99 6683.5,1321.48 6683.5,1378.78 6707.72,1402.99 6707.72,1697.15 6683.5,1721.37 6683.5,1823.3 6680.11,1826.68 6680.11,1902.11 6707.72,1929.71 6707.72,1981.71 6691.36,1998.07 v1(6691.36,2030)
SWDIO: J1.4 MD1.25 | length 1111.4
  Top Layer w5: MD1.25 6628.87,1302.43 6647.57,1302.43 v1(6650,1300) ; v1(6675,2300) 6675,2236.5 J1.4
  Bottom Layer w5: v1(6650,1300) 6675,1325 6675,1819.78 6671.61,1823.16 6671.61,1998.84 6675,2002.22 6675,2036.78 6684.03,2045.81 6684.03,2220.45 6675,2229.48 v1(6675,2300)
TX: J1.6 MD1.1 | length 1448.7
  Top Layer w5: MD1.1 6344.82,1158.33 6344.82,1140.18 v1(6345,1140) ; J1.6 v1(6715,2300)
  Layer 5 w5: v1(6345,1140) 6525.14,1320.14 6525.14,1378.78 6615.36,1468.99 6615.36,1836.49 6715,1936.13 6715,1966.87 6771.36,2023.22 6771.36,2127.97 6715,2184.33 v1(6715,2300)
pads on no net: B1.E1 BT1. D1.3 J1. J1.1 J1.2 J1.5 MD1.2 MD1.3 MD1.18 MD1.19 MD1.20 MD1.21 MD1.22 MD1.23 MD1.24 MD1.27 MD1.28 MD1.29 MD1.30 MD1.33 MD1.34 MD1.35 MD1.36 MD1.37 MD1.38 MD1.39 MD1.40 MD1.41 MD1.42 MD1.43 MD1.44 MD1.45 MD1.46 MD1.47 MD1.48 MD1.49 MD1.50 MD1.51 MD1.52 MD1.53 MD1.54 MD1.55 MD1.61 MD1.62 MD1.63 MD1.64 MD1.65 MD1.66 MD1.67 MD1.68 MD1.69 MD1.70 MD1.71 MD1.72 MD1.73 MD1.74 MD1.75 MD1.76 MD1.77 MD1.78 MD1.79 MD1.80 MD1.81 MD1.82 MD1.83 MD1.85 U1.2 U1.4 U1.7

## Polygon pours and split planes (outlines as drawn)
GND on Top Layer "NONET_L01_P-001" (solid, pour order 4): 6198.91,1400 6330,1400 6330,1000 6855,1000 6855,2330 6195,2330
NetB1_A3 on Top Layer "NONET_L01_P-001" (solid, pour order 1): 6424.13,2252.38 6455.3,2283.56 6541,2283.56 6563.64,2260.93 6563.64,2228.92 6541,2206.28 6478.7,2206.28 6454.65,2182.22 6448.85,2182.22 6437.09,2170.46 6430.35,2177.21 6430.35,2180.56 6437.09,2187.31 6437.09,2193.05 6424.13,2206.01
NetB1_C3 on Top Layer "NONET_L01_P-001" (solid, pour order 2): 6440,2170 6465,2150 6545,2150 6550,2155 6550,2180 6455,2180
1V8 on Top Layer "NONET_L01_P-001" (solid, pour order 3): 6420,2050 6420,2095 6430,2105 6430,2135 6450,2155 6455,2155 6485,2125 6545,2125 6545,2070 6525,2050
GND on Layer 4 "NONET_L01_P-001" (solid, pour order 9): 6198.53,1398.87 6329.62,1398.87 6329.62,998.87 6854.62,998.87 6854.62,2328.87 6194.62,2328.87
GND on Layer 2 "NONET_L01_P-001" (solid, pour order 8): 6198.53,1398.87 6329.62,1398.87 6329.62,998.87 6854.62,998.87 6854.62,2328.87 6194.62,2328.87
GND on Layer 1 "NONET_L01_P-001" (solid, pour order 0): 6198.91,1400 6330,1400 6330,1000 6855,1000 6855,2330 6195,2330
GND on Layer 6 "NONET_L01_P-001" (solid, pour order 11): 6198.53,1398.87 6329.62,1398.87 6329.62,998.87 6854.62,998.87 6854.62,2328.87 6194.62,2328.87
GND on Layer 5 "NONET_L01_P-001" (solid, pour order 10): 6198.53,1398.87 6329.62,1398.87 6329.62,998.87 6854.62,998.87 6854.62,2328.87 6194.62,2328.87
1V8 on Layer 3 "NONET_L01_P-001" (solid, pour order 7): 6198.91,1405 6330,1405 6330,1005 6855,1005 6855,2335 6195,2335
GND on Bottom Layer "NONET_L01_P-001" (solid, pour order 12): 6198.53,1398.87 6329.62,1398.87 6329.62,998.87 6854.62,998.87 6854.62,2328.87 6194.62,2328.87

## Silkscreen, mask and mechanical layers (free items; w line width, h text height)
Mechanical 15:
  the board outline again, w10